# EAGLE board test1 (EAGLE 7.3.0)
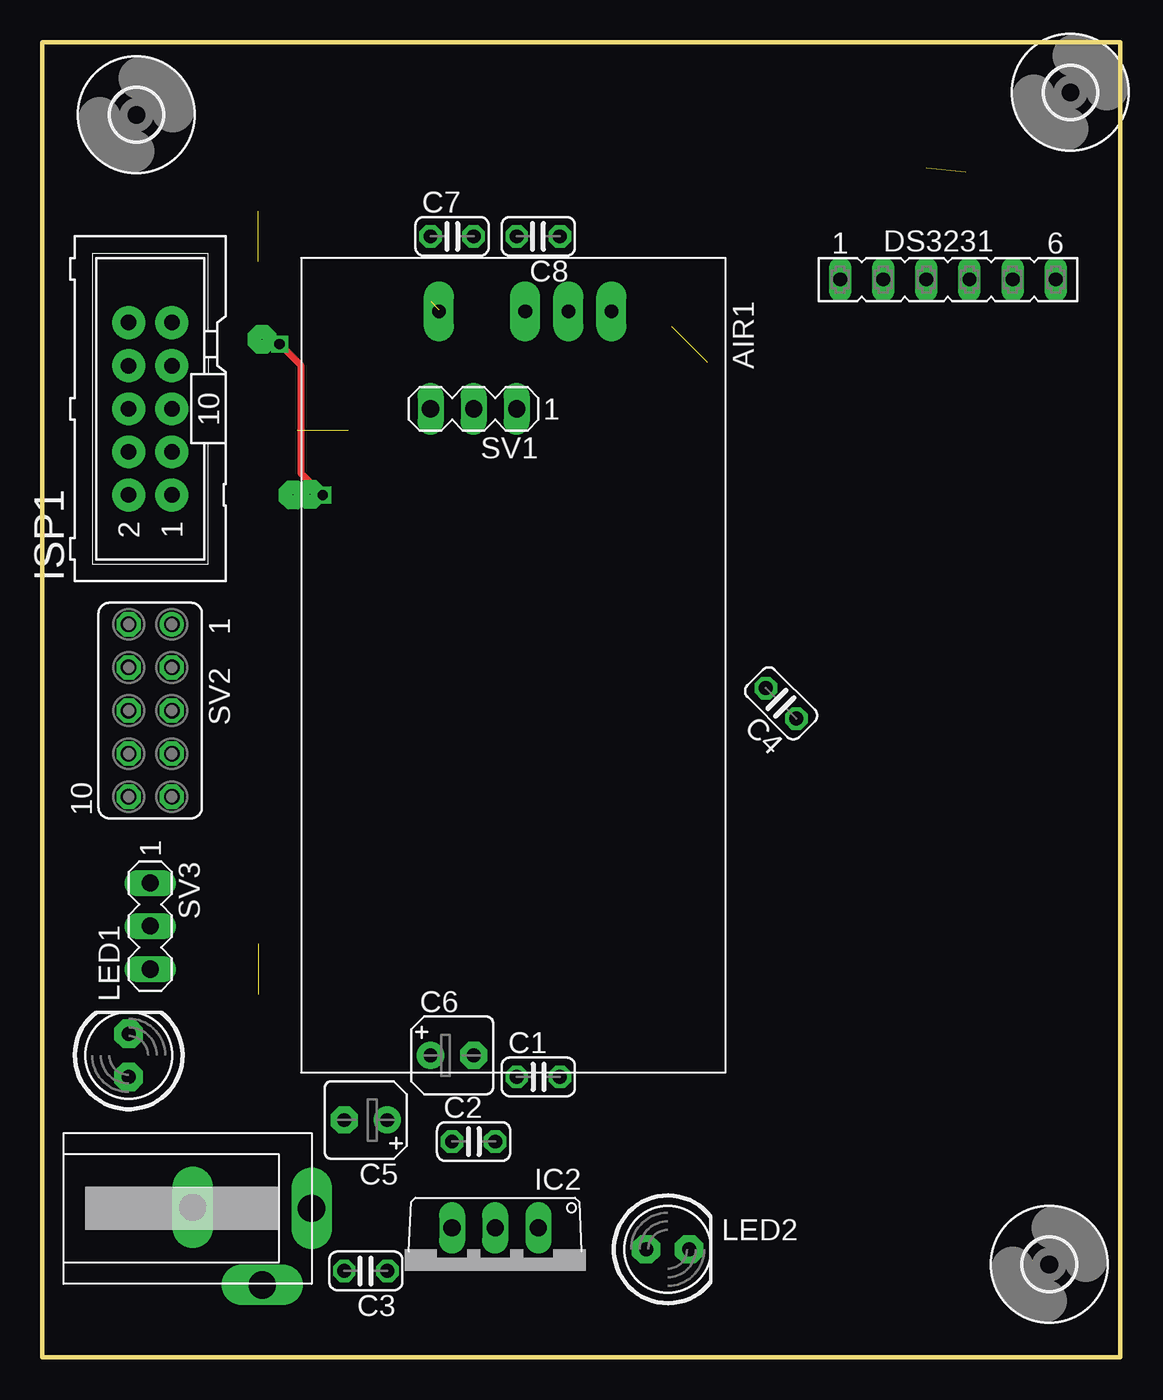
[diagram p0: board, top side]
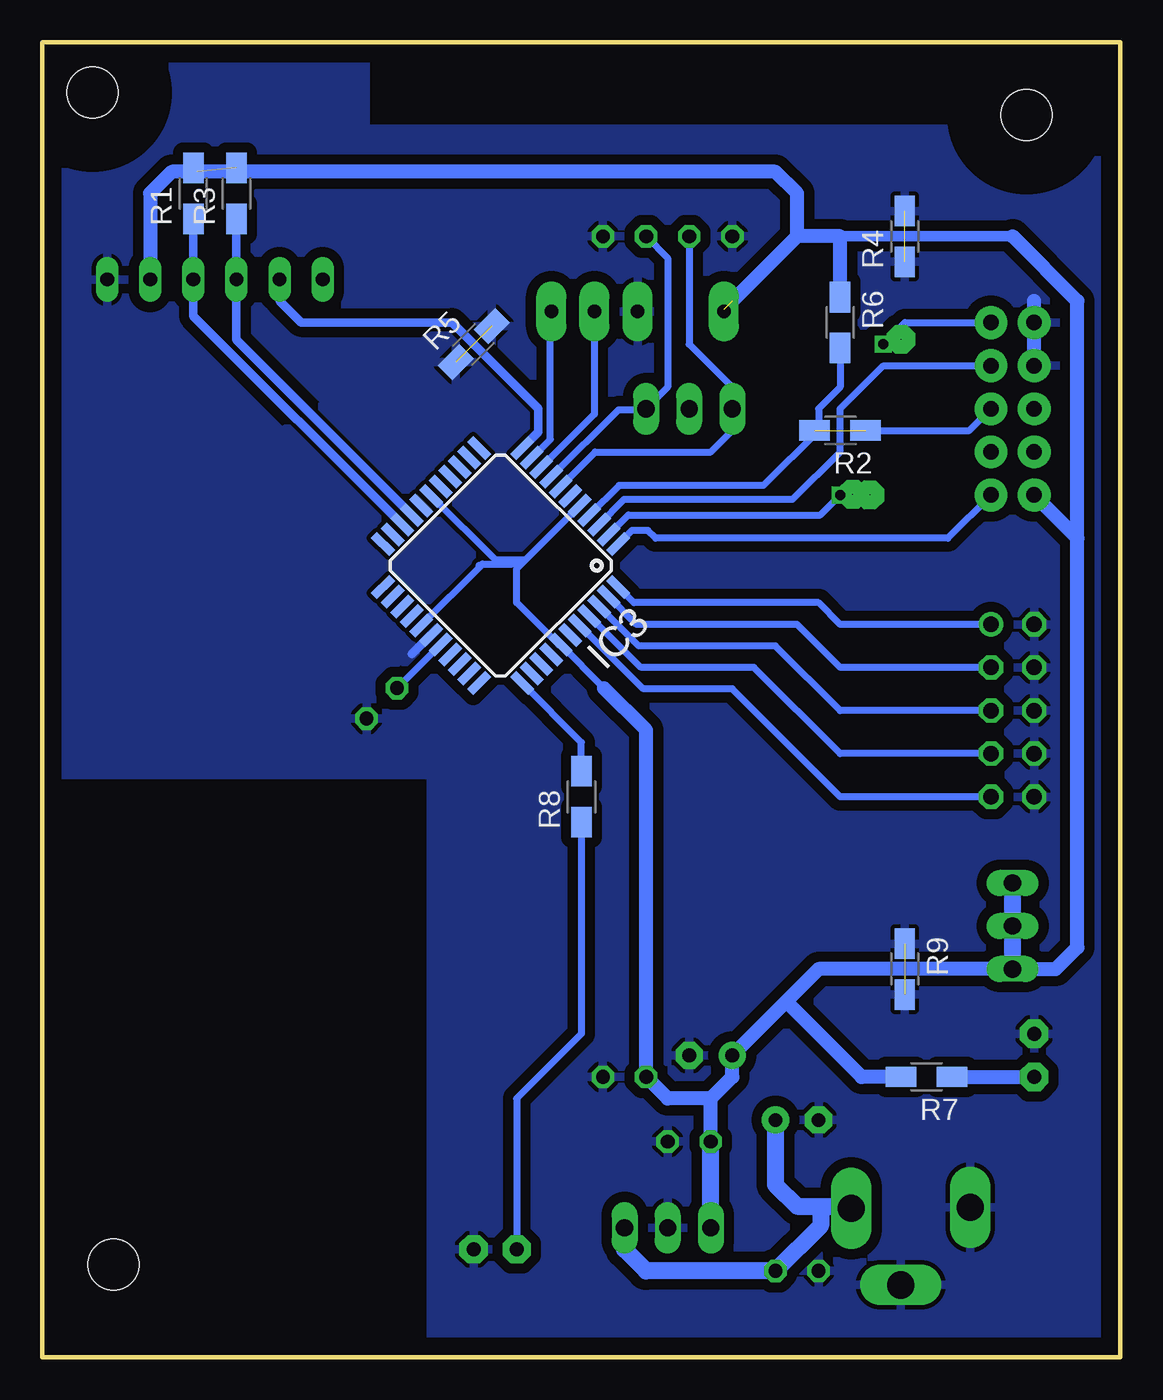
[diagram p1: board, bottom side, seen from below]

Size 63.5 x 77.47 mm. Coordinates in mm from the lower left corner, seen from the top.
Outline: 62.23,0 63.5,0
Outline: 63.5,0 0,0 0,77.47 63.5,77.47 63.5,0
Copper layers (1*16): Top 0.035mm / dielectric 1.5mm / Bottom 0.035mm
Design rules "default": minimum track width 10mil, minimum drill 24mil, track to track 8mil, track to pad 8mil, pad to pad 8mil, via to via 8mil, smd to smd 8mil, copper to edge 40mil, drill to drill 8mil, minimum pad ring 10mil, minimum via ring 8mil, stop-mask expansion 4mil, vias tented up to drill 0mil, thermal gap 10mil

## Footprints (pad centres in the part's own frame; a part is rotated, then mirrored left to right if it is on the bottom)
ATNEL-AIR = drill 0.8 pad 1.778 long: 1 3.15,8.12; 2 3.15,13.2; 3 3.15,15.74; 4 3.15,18.28
C025-024X044 = drill 0.813 octagon: 1 -1.27,0; 2 1.27,0
B45181A = drill 0.813 pad 1.6: + -1.27,0 | drill 0.813 pad 1.6 octagon: - 1.27,0
FE06 = drill 0.813 long: 1 -6.35,0; 2 -3.81,0; 3 -1.27,0; 4 1.27,0; 5 3.81,0; 6 6.35,0
3,0 = hole 3: 0,0
TO220V = drill 1.016 long: 1 -2.54,-2.54; 2 0,-2.54; 3 2.54,-2.54
TQFP44 = smd 1.5 x 0.5: 1 -5.8,4; 2 -5.8,3.2; 3 -5.8,2.4; 4 -5.8,1.6; 5 -5.8,0.8; 6 -5.8,0; 7 -5.8,-0.8; 8 -5.8,-1.6; 9 -5.8,-2.4; 10 -5.8,-3.2; 11 -5.8,-4; 23 5.8,-4; 24 5.8,-3.2; 25 5.8,-2.4; 26 5.8,-1.6; 27 5.8,-0.8; 28 5.8,0; 29 5.8,0.8; 30 5.8,1.6; 31 5.8,2.4; 32 5.8,3.2; 33 5.8,4 | smd 0.5 x 1.5: 12 -4,-5.8; 13 -3.2,-5.8; 14 -2.4,-5.8; 15 -1.6,-5.8; 16 -0.8,-5.8; 17 0,-5.8; 18 0.8,-5.8; 19 1.6,-5.8; 20 2.4,-5.8; 21 3.2,-5.8; 22 4,-5.8; 34 4,5.8; 35 3.2,5.8; 36 2.4,5.8; 37 1.6,5.8; 38 0.8,5.8; 39 0,5.8; 40 -0.8,5.8; 41 -1.6,5.8; 42 -2.4,5.8; 43 -3.2,5.8; 44 -4,5.8
ML10 = drill 0.914 pad 1.93: 1 -5.08,-1.27; 2 -5.08,1.27; 3 -2.54,-1.27; 4 -2.54,1.27; 5 0,-1.27; 6 0,1.27; 7 2.54,-1.27; 8 2.54,1.27; 9 5.08,-1.27; 10 5.08,1.27
LED5MM = drill 0.813 pad 1.676 octagon: A -1.27,0; K 1.27,0
R1206W = smd 1.8 x 1.2: 1 -1.499,0; 2 1.499,0
MA03-1 = drill 1.016 long: 1 -2.54,0; 2 0,0; 3 2.54,0
FE05-2 = drill 0.914: 1 -5.08,1.27 | drill 0.914 octagon: 2 -5.08,-1.27; 3 -2.54,1.27; 4 -2.54,-1.27; 5 0,1.27; 6 0,-1.27; 7 2.54,1.27; 8 2.54,-1.27; 9 5.08,1.27; 10 5.08,-1.27
DC_5,5X2,5 = drill 1.6 long: P$1 14.605,4.445; P$2 11.7,-0.07; P$3 7.6,4.5

## Placement (x,y rotation side)
AIR1  [ATNEL-AIR]  15.24,64.77 270 top
C1  100nF  [C025-024X044]  29.21,16.51 0 top
C2  100nF  [C025-024X044]  25.4,12.7 0 top
C3  100nF  [C025-024X044]  19.05,5.08 180 top
C4  100nF  [C025-024X044]  43.51,38.52 135 top
C5  47uF  [B45181A]  19.05,13.97 180 top
C6  22uF  [B45181A]  24.13,17.78 0 top
C7  22pF  [C025-024X044]  24.13,66.04 0 top
C8  22pF  [C025-024X044]  29.21,66.04 180 top
DS3231  [FE06]  53.34,63.5 0 top
H1  MOUNT-HOLE3.0  [3,0]  5.54,73.2 0 top
H2  MOUNT-HOLE3.0  [3,0]  60.55,74.52 0 top
H3  MOUNT-HOLE3.0  [3,0]  59.31,5.46 0 top
IC2  7805TV  [TO220V]  26.67,5.08 180 top
IC3  MEGA32-A  [TQFP44]  36.51,46.64 225 bottom
ISP1  [ML10]  6.35,55.88 90 top
LED1  [LED5MM]  5.08,17.78 90 top
LED2  [LED5MM]  36.83,6.35 0 top
R1  4K7  [R1206W]  54.61,68.58 90 bottom
R2  0R  [R1206W]  16.51,54.61 180 bottom
R3  4K7  [R1206W]  52.07,68.58 90 bottom
R4  0R  [R1206W]  12.7,66.04 90 bottom
R5  0R  [R1206W]  38.1,59.69 45 bottom
R6  10K  [R1206W]  16.51,60.96 270 bottom
R7  280R  [R1206W]  11.43,16.51 180 bottom
R8  300R  [R1206W]  31.75,33.02 90 bottom
R9  0R  [R1206W]  12.7,22.86 270 bottom
SV1  kwarc  [MA03-1]  25.4,55.88 180 top
SV2  przyciski  [FE05-2]  6.35,38.1 270 top
SV3  VCC  [MA03-1]  6.35,25.4 270 top
U$1  DC_5,5X2,5  [DC_5,5X2,5]  1.24,4.32 0 top

## Library data of the parts
AIR1 = ATNEL-WIFI232-T
C1-C8 = rcl
DS3231 SV2 = con-lsta; OC_FARNELL: unknown; OC_NEWARK: unknown
H1-H3 = holes
IC2 = linear
IC3 = atmel; MPN: ATMEGA32-16AU; OC_FARNELL: 9171274; OC_NEWARK: 69K6677
ISP1 = con-harting-ml; OC_FARNELL: unknown; OC_NEWARK: unknown
LED1 LED2 = adafruit
R1-R9 = resistor
SV1 SV3 = con-lstb; OC_FARNELL: unknown; OC_NEWARK: unknown
U$1 = wachcio

## Nets
GND: AIR1.2 C1.2 C2.2 C3.2 C4.1 C5.- C6.- C7.1 C8.1 DS3231.6 IC2.2 IC3.6 IC3.18 IC3.28 IC3.39 ISP1.8 ISP1.10 LED1.K LED2.K R4.1 R4.2 R5.1 R5.2 R9.1 R9.2 SV2.2 SV2.4 SV2.6 SV2.8 SV2.10 U$1.P$2 U$1.P$3
INT: DS3231.2 IC3.11
MISO: IC3.2 ISP1.9
MOSI: IC3.1 ISP1.1
N$1: AIR1.4 IC3.10
N$2: AIR1.3 IC3.9
N$3: C4.2 IC3.29
N$4: IC3.44 SV2.1
N$5: IC3.43 SV2.3
N$6: C3.1 C5.+ IC2.1 U$1.P$1
N$7: IC3.42 SV2.5
N$8: IC3.41 SV2.7
N$9: IC3.40 SV2.9
N$10: C7.2 IC3.7 SV1.3
N$11: C8.2 IC3.8 SV1.1
N$12: LED1.A R7.1
N$16: LED2.A R8.1
N$17: IC3.34 R8.2
RST: IC3.4 ISP1.5 R2.1 R2.2 R6.2
SCK: IC3.3 ISP1.7
SCL: DS3231.3 IC3.19 R3.1
SDA: DS3231.4 IC3.20 R1.1
VCC: AIR1.1 C1.1 C2.1 C6.+ DS3231.5 IC2.3 IC3.5 IC3.17 IC3.27 IC3.38 ISP1.2 R1.2 R3.2 R6.1 R7.2 SV3.1 SV3.2 SV3.3

## Tracks (layer width: path | path; a pad name or v marks a point on that pad's centre or on a via)
GND  (3 unrouted)
  Bottom 0.5: IC3.28 41.73,41.43 | IC3.18 41.18,50.17 | IC3.6
  Bottom 0.813: ISP1.8 5.08,62.23
  pour Bottom (isolate 0.61): 0,0 0,72.39 44.45,72.39 44.45,76.2 66.04,76.2 66.04,34.29 40.64,34.29 40.64,0
  pour Bottom (isolate 0.254): 26.67,48.26 39.37,60.96 53.34,52.07 38.1,36.83 34.29,36.83 26.67,44.45
INT
  Bottom 0.5: DS3231.2 49.53,62.23 48.26,60.96 39.37,60.96 34.29,55.88 34.29,54.52 IC3.11
MISO  (via drill 0.6)
  Top 0.406: v16.51,50.8 15.24,52.07 15.24,58.42 v13.97,59.69
  Bottom 0.406: IC3.2 28.98,49.63 17.68,49.63 v16.51,50.8 | v13.97,59.69 12.7,60.96 ISP1.9
MOSI
  Bottom 0.406: 29.55,47.92 IC3.1 28.78,48.72 27.84,48.72 27.38,48.26 10.16,48.26 ISP1.1
N$1
  Bottom 0.406: IC3.10 34.65,53.01 33.58,54.08 33.58,61.56 AIR1.4
N$2
  Bottom 0.406: AIR1.3 30.98,55.57 IC3.9
N$3
  Bottom 0.406: C4.2 42.65,39.37 IC3.29
N$4
  Bottom 0.406: SV2.1 16.51,43.18 17.78,44.45 28.66,44.45 IC3.44
N$5
  Bottom 0.406: SV2.3 16.51,40.64 19.05,43.18 28.52,43.18 IC3.43
N$6
  Bottom 0.61: 17.65,8.76 U$1.P$1 15.98,8.89
  Bottom 1.016: IC2.1 29.21,6.35 27.94,5.08 C3.1 17.65,7.75 17.65,8.76 | C5.+ 20.32,10.16 19.05,8.89 15.98,8.89
N$7
  Bottom 0.406: SV2.5 16.51,38.1 20.32,41.91 28.38,41.91 IC3.42
N$8
  Bottom 0.406: SV2.7 16.51,35.56 21.59,40.64 28.24,40.64 IC3.41
N$9
  Bottom 0.406: SV2.9 16.51,33.02 22.86,39.37 28.1,39.37 IC3.40
N$10
  Bottom 0.406: IC3.7 30.94,53.34 24.13,53.34 22.86,54.61 SV1.3 22.86,57.15 25.4,59.69 C7.2
N$11
  Bottom 0.406: IC3.8 33.52,51.88 29.57,55.83 27.99,55.83 SV1.1 26.67,57.15 26.67,64.77 C8.2
N$12
  Bottom 0.813: R7.1 LED1.A
N$13  (via drill 0.03 pad 1.68)
  other vias: 12.93,59.97
N$14  (via drill 0.03 pad 1.68)
  other vias: 15.77,50.85
N$15  (via drill 0.03 pad 1.68)
  other vias: 14.76,50.8
N$16
  Bottom 0.406: R8.1 31.75,19.05 35.56,15.24 LED2.A
N$17
  Bottom 0.406: R8.2 31.75,36.23 IC3.34
RST  (2 unrouted)
  Bottom 0.406: 31.21,49.69 31.21,49.61 IC3.4 29.53,51.36 21.03,51.36 17.78,54.61 17.78,55.88 16.51,57.15 R6.2 | R2.1 8.89,54.61 ISP1.5
SCK
  Bottom 0.406: IC3.3 30.71,49.07 29.23,50.55 19.3,50.55 16.51,53.34 16.51,55.88 13.97,58.42 ISP1.7
SCL
  Bottom 0.5: IC3.19 52.07,59.94 DS3231.3 R3.1
SDA
  Bottom 0.5: IC3.20 54.61,61.35 DS3231.4 R1.1
VCC  (2 unrouted)
  Bottom 0.406: 30.42,39.43 IC3.38 33.09,41.98 35.56,44.45 35.56,46.46 35.03,46.99 | 35.03,46.99 IC3.5 | 35.56,46.99 36.83,46.99 40.58,50.74 IC3.17 40.61,50.77 | 35.56,46.99 35.03,46.99 | IC3.27 41.18,43.13 37.71,46.6 | 37.71,46.6 37.57,46.74 35.81,46.74 35.56,46.99 | 37.77,46.66 37.71,46.6 | AIR1.1 23.36,61.73
  Bottom 0.61: 6.35,66.04 16.51,66.04
  Bottom 0.813: C2.1 24.13,15.24 | 24.13,15.24 22.86,16.51 C6.+ 19.68,20.95 | 24.13,15.24 26.67,15.24 C1.1 27.94,36.94 30.42,39.43 | 2.54,48.26 2.54,24.13 3.81,22.86 SV3.3 17.78,22.86 19.68,20.95 | 2.54,48.26 2.54,62.23 6.35,66.04 | 19.05,66.04 16.51,66.04 R6.1 | 54.38,69.85 R1.2 | 54.38,69.85 55.88,69.85 57.15,68.58 DS3231.5 | ISP1.2 2.54,48.26 | 22.86,62.23 19.05,66.04 | 19.05,66.04 19.05,68.58 20.32,69.85 54.38,69.85 | R7.2 15.24,16.51 19.68,20.95
  Bottom 1.016: SV3.3 SV3.2 SV3.1 | IC2.3 C2.1

## Text on the board
bTest: Wachcio 2016-05-10